# EAGLE board LIS331HH_Breakout (EAGLE 5.10)
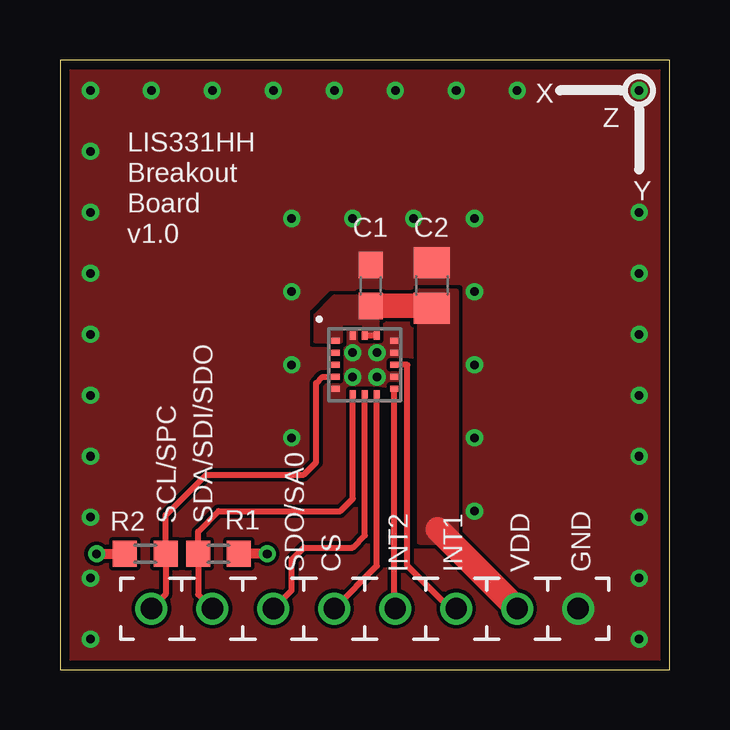
[diagram p0: board, top side]
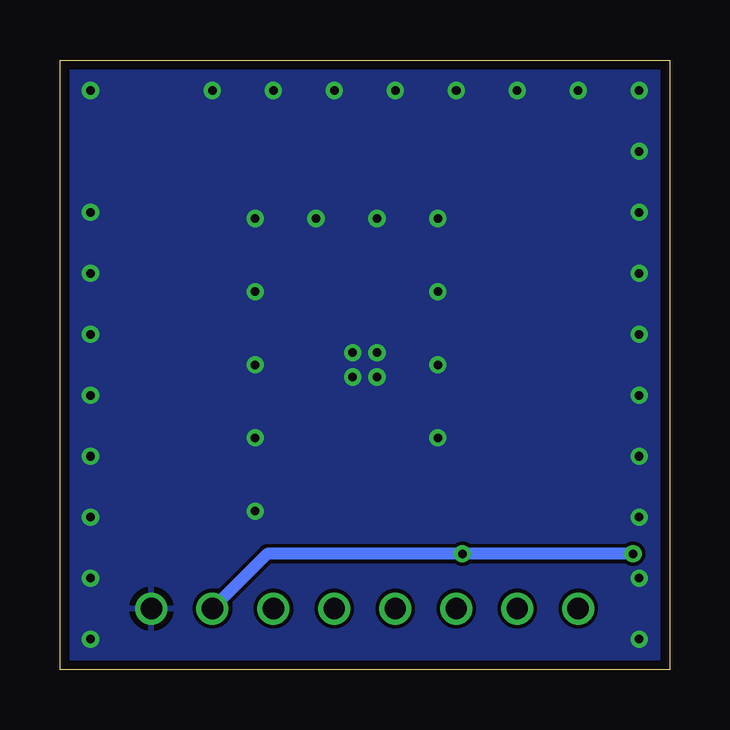
[diagram p1: board, bottom side, seen from below]

Size 25.4 x 25.4 mm. Coordinates in mm from the lower left corner, seen from the top.
Outline: 0,0 25.4,0 25.4,25.4 0,25.39 0,0
Copper layers (1*16): Top 0.0356mm / dielectric 1.5011mm / Bottom 0.0356mm
Design rules "LaenPCBOrder": minimum track width 6mil, minimum drill 13mil, track to track 6mil, track to pad 6mil, pad to pad 6mil, via to via 6mil, smd to smd 6mil, copper to edge 15mil, drill to drill 6mil, minimum pad ring 7mil, minimum via ring 7mil, stop-mask expansion 4mil, vias tented up to drill 0mil, thermal gap 10mil

## Footprints (pad centres in the part's own frame; a part is rotated, then mirrored left to right if it is on the bottom)
C0603 = smd 1.1 x 1: 1 -0.85,0; 2 0.85,0
C0805 = smd 1.3 x 1.5: 1 -0.95,0; 2 0.95,0
JUMPPAD = drill 0.889 round: PAD 0,0
R0603 = smd 1 x 1.1: 1 -0.85,0; 2 0.85,0
LGA-16(3X3X1) = smd 0.35 x 0.25: 1 -1.225,1; 2 -1.225,0.5; 3 -1.225,0; 4 -1.225,-0.5; 5 -1.225,-1; 9 1.225,-1; 10 1.225,-0.5; 11 1.225,0; 12 1.225,0.5; 13 1.225,1 | smd 0.25 x 0.35: 6 -0.5,-1.225; 7 0,-1.225; 8 0.5,-1.225; 14 0.5,1.225; 15 0,1.225; 16 -0.5,1.225

## Placement (x,y rotation side)
C1  0.1u  [C0603]  12.95,16 90 top
C2  10u  [C0805]  15.49,16 90 top
CS  JUMPPAD  [JUMPPAD]  11.43,2.54 0 top
GND  JUMPPAD  [JUMPPAD]  21.59,2.54 0 top
INT1  JUMPPAD  [JUMPPAD]  16.51,2.54 0 top
INT2  JUMPPAD  [JUMPPAD]  13.97,2.54 0 top
R1  10k  [R0603]  6.6,4.83 0 top
R2  10k  [R0603]  3.56,4.83 180 top
SCL/SPC  JUMPPAD  [JUMPPAD]  3.81,2.54 0 top
SDA/SDI/SDO  JUMPPAD  [JUMPPAD]  6.35,2.54 0 top
SDO/SA0  JUMPPAD  [JUMPPAD]  8.89,2.54 0 top
U$1  LIS331HH  [LGA-16(3X3X1)]  12.7,12.7 0 top
VDD  JUMPPAD  [JUMPPAD]  19.05,2.54 0 top

## Library data of the parts
C1 C2 R1 R2 = rcl
CS GND INT1 INT2 SCL/SPC SDA/SDI/SDO SDO/SA0 U$1 VDD = Compass

## Nets
CS: CS.PAD U$1.8
GND: C1.2 C2.2 GND.PAD U$1.5 U$1.10 U$1.12 U$1.13 U$1.16
INT1: INT1.PAD U$1.11
INT2: INT2.PAD U$1.9
SCL/SPC: R2.1 SCL/SPC.PAD U$1.4
SDA/SDI/SDO: R1.1 SDA/SDI/SDO.PAD U$1.6
SDO/SA0: SDO/SA0.PAD U$1.7
VDD: C1.1 C2.1 R1.2 R2.2 U$1.1 U$1.14 U$1.15 VDD.PAD

## Tracks (layer width: path | path; a pad name or v marks a point on that pad's centre or on a via)
CS
  Top 0.25: U$1.8 13.2,4.33 13.21,4.32 CS.PAD
GND  (via drill 0.36)
  Top 0.25: U$1.10
  other vias: 12.19,12.19 13.21,13.21 12.19,13.21 13.21,12.19 24.13,24.13 17.27,12.7 17.27,9.65 9.65,12.7 17.27,6.6 9.65,9.65 9.65,15.75 9.65,18.8 12.19,18.8 14.73,18.8 17.27,18.8 17.27,15.75 24.13,1.27 24.13,3.81 24.13,6.35 24.13,8.89 24.13,11.43 24.13,13.97 24.13,16.51 24.13,19.05 1.27,1.27 1.27,3.81 1.27,6.35 1.27,8.89 1.27,11.43 1.27,13.97 1.27,16.51 1.27,19.05 1.27,21.59 1.27,24.13 3.81,24.13 6.35,24.13 8.89,24.13 11.43,24.13 13.97,24.13 16.51,24.13 19.05,24.13
  pour Top (rank 6, no thermals): 0,25.4 25.4,25.4 25.4,0 0,0
  pour Bottom: 0,25.4 25.4,25.4 25.4,0 0,0
INT1
  Top 0.25: U$1.11 14.48,12.7 14.48,4.32 16.26,2.54 INT1.PAD
INT2
  Top 0.25: U$1.9 13.93,2.58 INT2.PAD
SCL/SPC
  Top 0.25: SCL/SPC.PAD 4.41,3.14 R2.1 4.41,6.44 6.1,8.13 10.16,8.13 10.67,8.64 10.67,11.94 10.93,12.2 U$1.4
SDA/SDI/SDO
  Top 0.25: SDA/SDI/SDO.PAD 5.75,3.14 R1.1 5.75,5.75 6.6,6.6 11.68,6.6 12.2,7.12 U$1.6
SDO/SA0
  Top 0.25: U$1.7 12.7,5.59 12.19,5.08 10.16,5.08 9.65,4.57 9.65,3.3 SDO/SA0.PAD
VDD  (via drill 0.36)
  Top 0.254: U$1.15 U$1.14
  Top 0.406: v1.52,4.83 R2.2 | v8.64,4.83 R1.2
  Top 1.016: C1.1 15.39,15.15 C2.1 | VDD.PAD 15.75,5.84
  Bottom 0.508: VDD.PAD 16.76,4.83 v8.64,4.83 v1.52,4.83
  pour Top (no thermals): 14.99,15.75 14.99,5.33 16.51,5.33 16.51,15.75
  pour Top (no thermals): 13.21,13.97 13.21,15.49 11.43,15.49 10.67,14.73 10.67,13.72 11.68,13.72 11.68,14.48 12.7,14.48 12.7,13.97

## Text on the board
tPlace: X | Z | LIS331HH | Breakout | Y | Board | v1.0